# Altium PCB RogoIR.PcbDoc
Units mm, origin at the board's own origin, x right, y up, seen from the top; angles counter-clockwise.
Board outline 62.5 x 62.5 mm, 2 copper layers (Top Layer, Bottom Layer); 73 components, 60 nets, 295 pads, 114 vias.
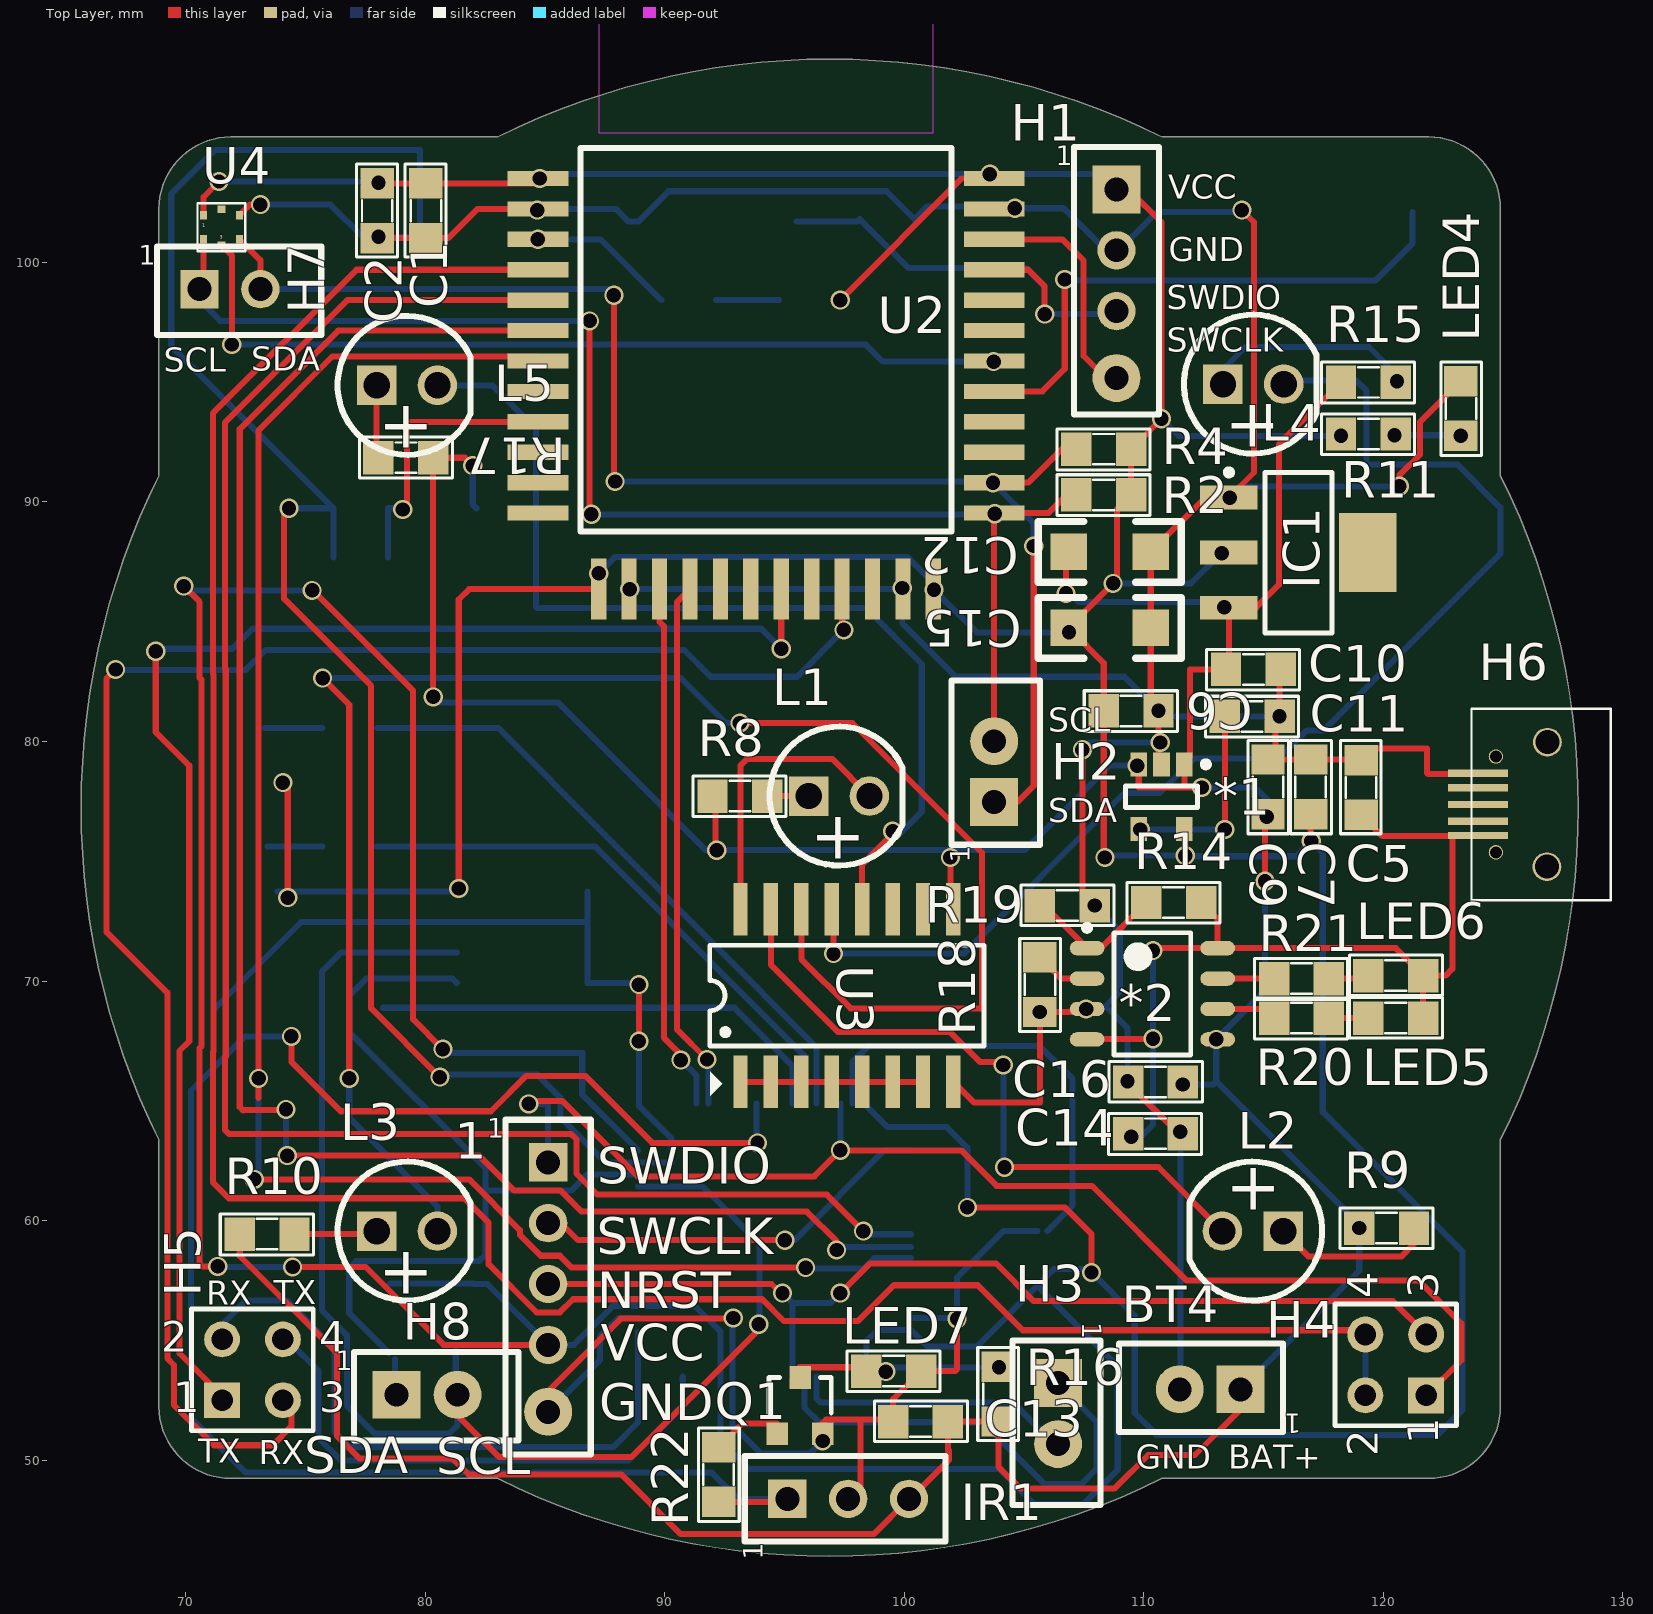
[diagram p0: Top Layer view]
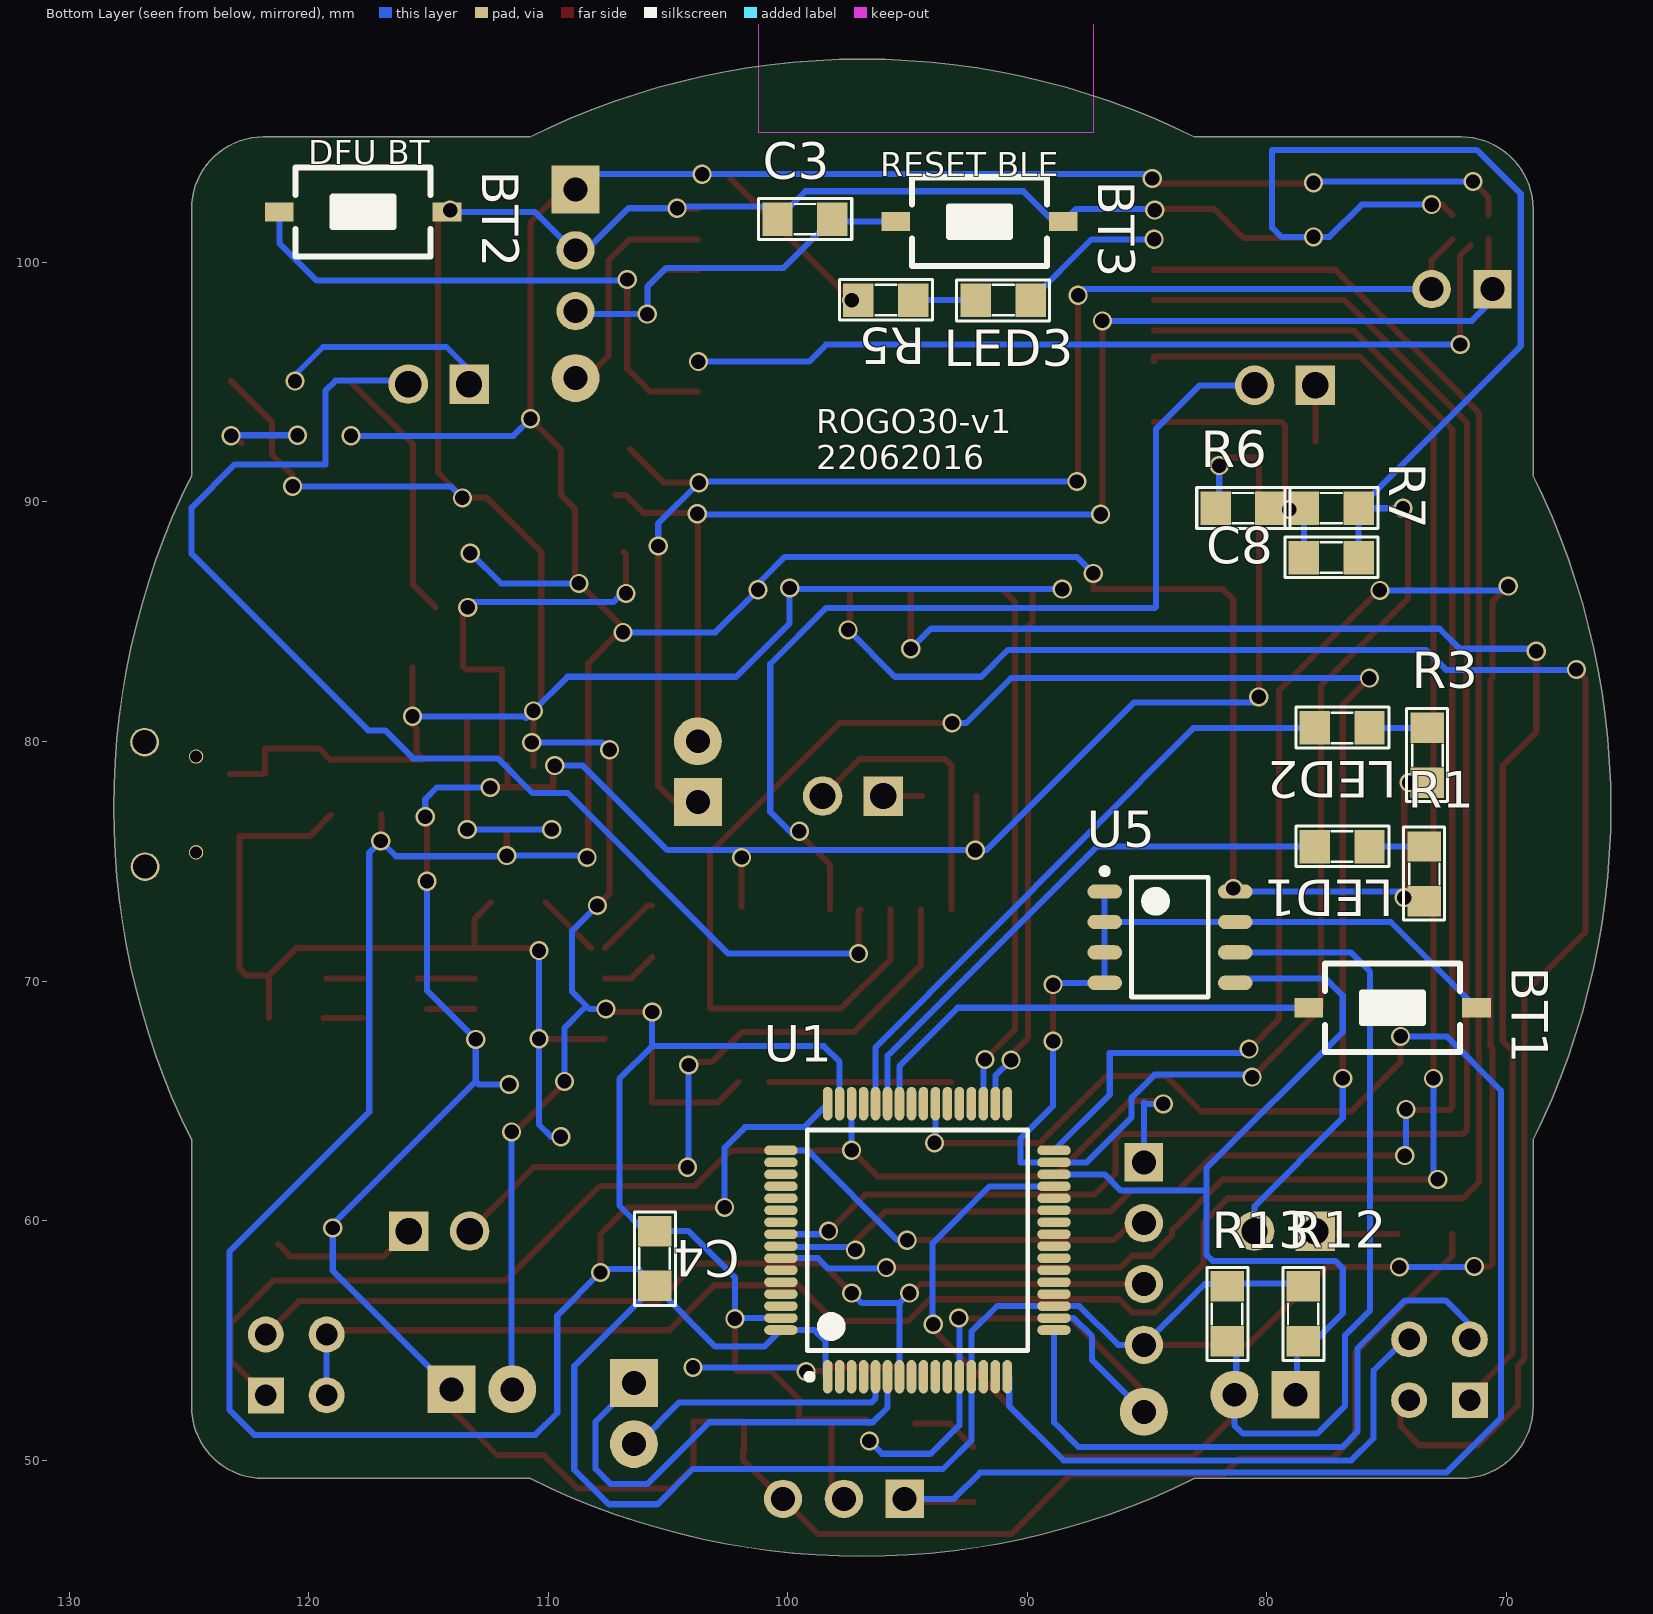
[diagram p1: Bottom Layer view, seen from below]
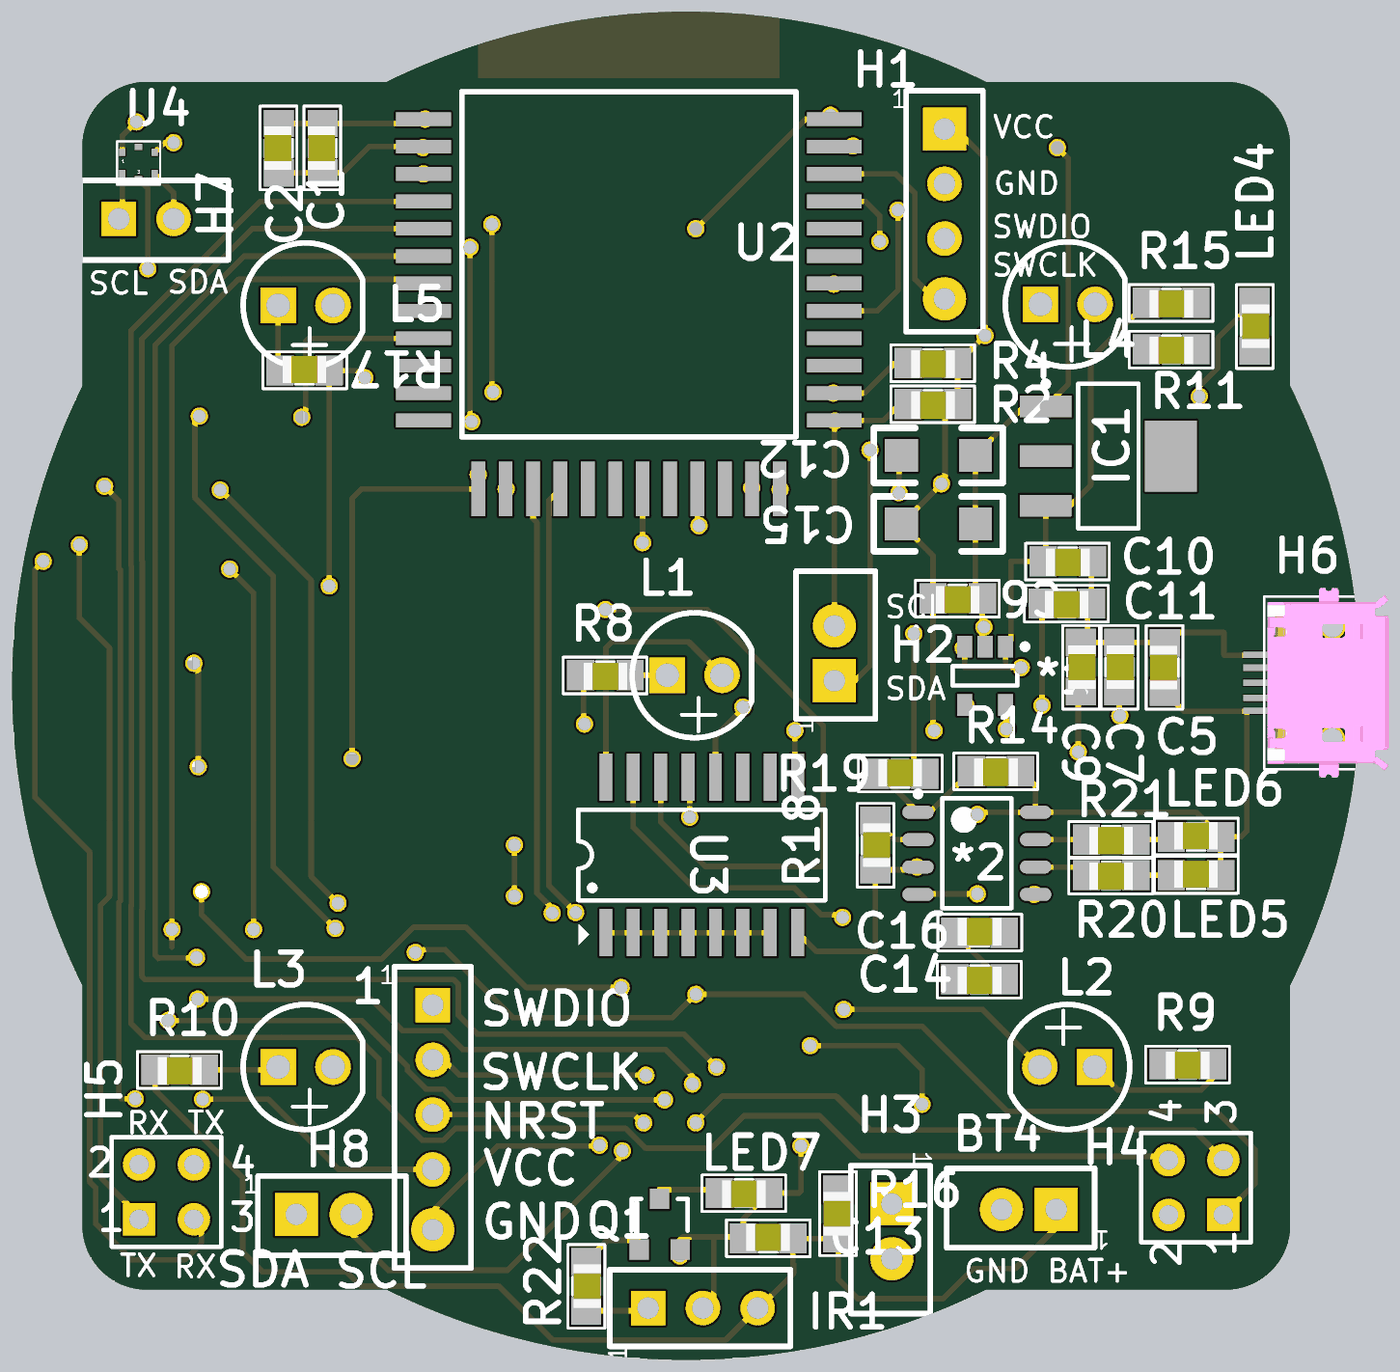
[diagram p2: 3D render of the assembled board from above, using the file's embedded part models]
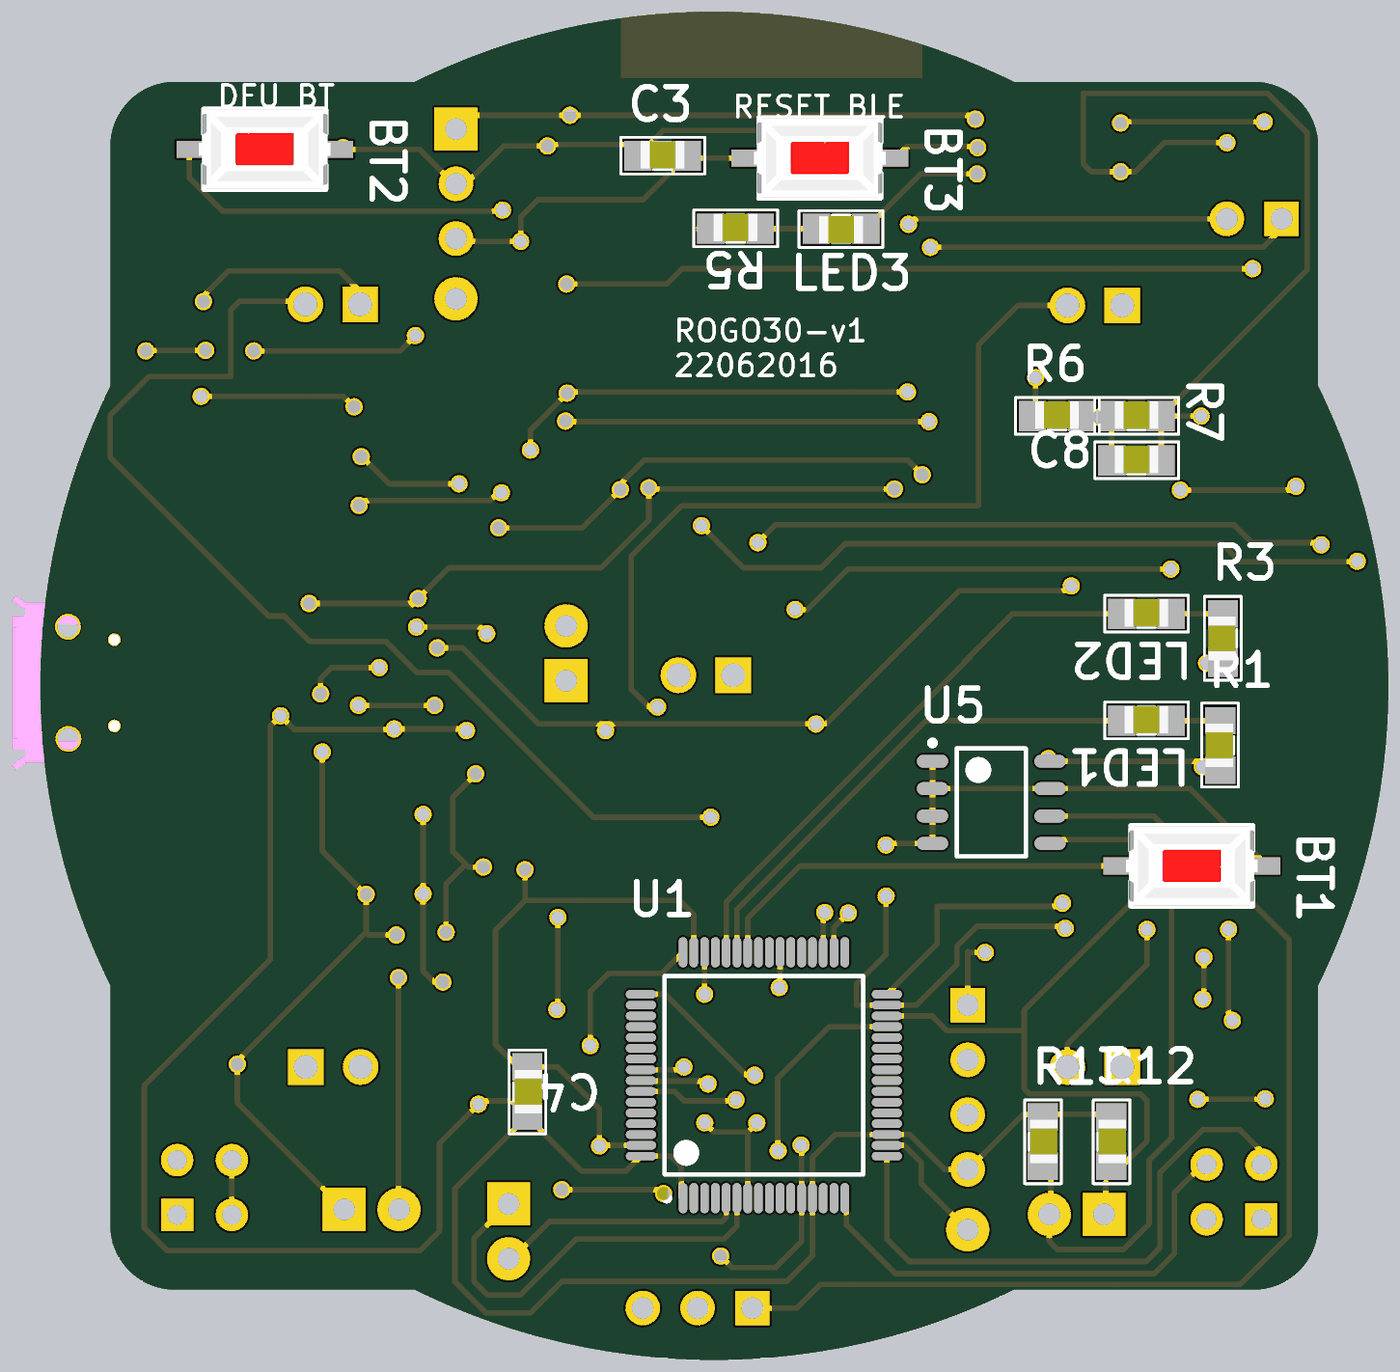
[diagram p3: 3D render of the assembled board from below, using the file's embedded part models]

## Layer stack, top to bottom
Top Solder: solder mask 0.0102, Solder Resist, Dk 3.5
Top Layer: signal copper 0.0356
Dielectric 1: dielectric 0.32, FR-4, Dk 4.8
Bottom Layer: signal copper 0.0356
Bottom Solder: solder mask 0.0102, Solder Resist, Dk 3.5

## Board outline
68.892,52.237 ccw(c71.892,52.237) 71.892,49.237 83.016,49.237 ccw(c96.892,77.237) 110.769,49.237 121.892,49.237 ccw(c121.892,52.237) 124.892,52.237 124.892,63.36 ccw(c96.892,77.237) 124.892,91.114 124.892,102.237 ccw(c121.892,102.237) 121.892,105.237 110.769,105.237 ccw(c96.892,77.237) 83.016,105.237 71.892,105.237 ccw(c71.892,102.237) 68.892,102.237 68.892,91.114 ccw(c96.892,77.237) 68.892,63.36

## Design rules (kind name [scope] priority, off if disabled: settings)
Clearance [All] p1: gap=0.254
PolygonConnect [All] p1: connectstyle=Relief reliefconductorwidth=0.254 reliefentries=4 polygonreliefangle="90 Angle" airgapwidth=0.254
RoutingVias [All] p1: holewidth=0.6 width=0.8 viastyle="Through Hole" minholewidth=0.6 minwidth=0.8 maxholewidth=0.6 maxwidth=0.8
SolderMaskExpansion [All] p1: expansion=0.102
Width [All] p1: maxlimit=0.305 minlimit=0.152 preferedwidth=0.254
30 further rules are at their usual default settings.

## Components (designator, comment, footprint, x,y, rotation, side; value= is the part's Value field where it differs from the comment)
1 "H05S" H05SA 85.141,62.433 r0 top
*1 "LDR3985-3.3" LDR3985-3.3 110.744,77.699 r270 top
*2 "TP4056" TP4056 110.363,69.469 r0 top
BT1 "ST_BT_DEBUG" SW2-SMD 74.752,68.885 r180 bottom
BT2 "DFU_BLE" SW2-SMD 117.729,102.108 r180 bottom
BT3 "RESET_BLE" SW2-SMD 91.999,101.702 r180 bottom
BT4 "PIN 3V" H02MA 114.046,52.959 r180 top
C1 "104" 0805 80.035,102.159 r270 top
C2 "104" 0805 78.003,102.159 r270 top
C3 "104" 0805 99.289,101.803 r0 bottom
C4 "104" 0805 105.562,58.42 r90 bottom
C5 "10uF" 0805 119.075,78.08 r270 top
C6 "10uF" 0805 109.474,81.28 r0 top
C7 "10uF" 0805 116.967,78.105 r90 top
C8 "22p" 0805 77.318,87.681 r0 bottom
C9 "10uF" 0805 115.189,78.105 r90 top
C10 "10uF" 0805 114.579,83.007 r0 top
C11 "10uF" 0805 114.529,81.051 r0 top
C12 "106" 1206 108.712,88.265 r0 top
C13 "22p" 0805 100.686,51.613 r180 top
C14 "10uF" 0805 110.49,63.627 r0 top
C15 "106" 1206 108.712,85.09 r0 top
C16 "10uF" 0805 110.49,65.786 r180 top
H1 "NAP SWD" H04SA 108.864,103.048 r0 top
H2 "H02S" H02SA#1 103.759,77.47 r90 top
H3 "H02S" H02SA#1 106.426,53.213 r270 top
H4 "H04M" HDR2X2 121.793,52.705 r90 top
H5 "H04M" HDR2X2 71.526,52.502 r0 top
H6 "USB" Micro_USB 124.333,76.073 r90 top (schematic designator H?)
H7 "H02S" H02SA#2 70.587,98.882 r0 top
H8 "H02S" H02SA#1 78.816,52.73 r0 top
IC1 "LM1117" lm1117-3.3 116.459,87.884 r0 top
IR1 "IR" H03SA 95.123,48.387 r90 top
L1 "LED_Z5" LED_Z5 97.282,77.724 r0 top
L2 "LED_Z5" LED_Z5 114.554,59.563 r180 top
L3 "LED_Z5" LED_Z5 79.248,59.563 r0 top
L4 "LED_Z5" LED_Z5 114.579,94.92 r0 top
L5 "LED_Z5" LED_Z5 79.248,94.869 r0 top
LED1 "LED" 0805 76.86,75.616 r0 bottom
LED2 "LED" 0805 76.86,80.569 r0 bottom
LED3 "LED" 0805 91.008,98.425 r180 bottom
LED4 "LED" 0805 123.241,93.904 r90 top
LED5 "LED" 0805 120.523,68.453 r180 top
LED6 "LED" 0805 120.523,70.231 r180 top
LED7 "LED" 0805 99.568,53.721 r0 top
Q1 "TRAN-NPN-SMD" TRAN-NPN-SMD 95.656,52.273 r0 top
R1 "1K" 0805 73.431,74.473 r270 bottom
R2 "RESISTOR" 0805 108.331,90.297 r0 top
R3 "1K" 0805 73.304,79.426 r270 bottom
R4 "RESISTOR" 0805 108.331,92.202 r0 top
R5 "1K" 0805 95.91,98.425 r0 bottom
R6 "1M" 0805 81.001,89.738 r0 bottom
R7 "220K" 0805 77.318,89.738 r0 bottom
R8 "2Ohm2" 0805 93.142,77.724 r0 top
R9 "2Ohm2" 0805 120.142,59.69 r0 top
R10 "2Ohm2" 0805 73.406,59.436 r0 top
R11 "1K" 0805 119.38,92.837 r0 top
R12 "RESISTOR" 0805 78.486,56.109 r90 bottom
R13 "RESISTOR" 0805 81.661,56.109 r90 bottom
R14 "RESISTOR" 0805 111.252,73.279 r0 top
R15 "2Ohm2" 0805 119.38,94.996 r0 top
R16 "1k" 0805 103.937,52.756 r270 top
R17 "2Ohm2" 0805 79.197,91.846 r180 top
R18 "RESISTOR" 0805 105.664,69.85 r90 top
R19 "RESISTOR" 0805 106.807,73.152 r180 top
R20 "RESISTOR" 0805 116.586,68.453 r0 top
R21 "RESISTOR" 0805 116.586,70.104 r0 top
R22 "1k" 0805 92.253,49.403 r90 top
U1 "STM32-64PINS" LQFP64Pins 94.59,59.182 r90 bottom
U2 "Module BLE Update" "Module Ble" 84.709,103.505 r0 top
U3 "ULN2003smd" ULN2003-smd16P 97.612,69.393 r0 top
U4 "HTS221" HTS221 71.501,101.473 r0 top
U5 "24C04" 24C04SOIC 84.049,71.831 r180 bottom

## Footprints (in the part's own frame and the unit in brackets; to place one, negate y for a bottom-side part, rotate by r counter-clockwise, add the part's x,y. Pads: shape width x height; smd on the part's side, far side on the other; paste and mask are expansions set on the pad)
24C04SOIC [mm]
  oval 1.45x0.6 smd: 1(-2.725,1.905) 2(-2.725,0.635) 3(-2.725,-0.635) 4(-2.725,-1.905) 5(2.725,-1.905) 6(2.725,-0.635) 7(2.725,0.635) 8(2.725,1.905)
  silkscreen extent -2.85,-2.5 1.6,2.88, body extent -2,-2.5 2,2.5, height 1.35
0805 [mil] "Compoment SMD 80x50mil"
  rect 50x55 smd: 1(-45,0) 2(45,0)
  silkscreen extent -77,-34 76,33, body extent -40,-27 40,23, height 24
1206 [mil]
  rect 60x60 smd: 1(-72.68,-13.74) 2(62.32,-13.74)
  silkscreen extent -123,-64 112,36
H02MA [mm] "HEADER, SINGLE, DISTANCE = 100mil"
  rect 2x2 hole 1: 1(0,0)
  round 2 hole 1: 2(2.54,0)
  silkscreen extent -1.78,-1.91 5.08,1.78
H02SA#1 [mm] "HEADER, SINGLE, DISTANCE = 100mil"
  rect 2x2 hole 1: 1(0,0)
  round 2 hole 1: 2(2.54,0)
  silkscreen extent -1.78,-1.91 5.08,1.78
H02SA#2 [mm] "HEADER, SINGLE, DISTANCE = 100mil"
  rect 1.6x1.6 hole 1: 1(0,0)
  round 1.6 hole 1: 2(2.54,0)
  silkscreen extent -1.78,-1.91 5.08,1.78
H03SA [mm] "HEADER, SINGLE, DISTANCE = 100mil"
  rect 1.6x1.6 hole 1: 1(0,0)
  round 1.6 hole 1: 2(0,-2.54) 3(0,-5.08)
  silkscreen extent -1.78,-6.6 1.78,1.78
H04SA [mm] "HEADER, SINGLE, DISTANCE = 100mil"
  rect 2x2 hole 1: 1(0,0)
  round 1.6 hole 1: 2(0,-2.54) 3(0,-5.08)
  round 2 hole 1: 4(0,-7.874)
  silkscreen extent -1.78,-9.4 1.78,1.78
H05SA [mm] "HEADER, SINGLE, DISTANCE = 100mil"
  rect 1.6x1.6 hole 1: 1(0,0)
  round 1.6 hole 1: 2(0,-2.54) 3(0,-5.08) 4(0,-7.62)
  round 2 hole 1: 5(0,-10.414)
  silkscreen extent -1.78,-12.19 1.78,1.78
HDR2X2 [mm] "Connector; Header; 2x2 Position"
  rect 1.5x1.5 hole 0.9: 1(0,0)
  round 1.5 hole 0.9: 2(0,2.54) 3(2.54,0) 4(2.54,2.54)
  silkscreen extent -1.27,-1.27 3.81,3.81
HTS221 [mm]
  rect 0.3x0.35 smd mask+0.05: 1(-0.75,0.5) 2(-0.75,-0.5) 4(0.75,-0.5) 5(0.75,0.5)
  rect 0.35x0.3 smd mask+0.05: 3(0,-0.75) 6(0,0.75)
  silkscreen extent -1,-1 1,1
LDR3985-3.3 [mm] "SOT23, 5-Leads, Body 2.90x2.80mm, Pitch 0.95mm, IPC Medium Density"
  rect 1x0.7 smd: 1(-1.35,0.95) 2(-1.35,0) 3(-1.35,-0.95) 4(1.35,-0.95) 5(1.35,0.95)
  silkscreen extent -1.47,-1.5 0.45,1.98, body extent -0.85,-1.5 0.85,1.5, height 0.9
LED_Z5 [mil] "LED phi 5mm"
  rect 65x65 hole 43.31: 1(-50,0)
  round 65 hole 43.31: 2(50,0)
  silkscreen extent -114,-114 104,114
lm1117-3.3 [mm] "SOT223, 4-Leads, Body 6.5x3.5mm, Pitch 2.3mm, Lead Span 7mm, IPC Medium Density"
  rect 2.4x1 smd: 1(-2.9,2.3) 2(-2.9,0) 3(-2.9,-2.3)
  rect 2.4x3.3 smd: 4(2.9,0)
  silkscreen extent -3.02,-3.35 1.4,3.47, body extent -1.85,-3.35 1.85,3.35, height 1.8
LQFP64Pins [mm]
  oval 1.4x0.4 smd: 1(-5.7,3.75) 2(-5.7,3.25) 3(-5.7,2.75) 4(-5.7,2.25) 5(-5.7,1.75) 6(-5.7,1.25) 7(-5.7,0.75) 8(-5.7,0.25) 9(-5.7,-0.25) 10(-5.7,-0.75) 11(-5.7,-1.25) 12(-5.7,-1.75) 13(-5.7,-2.25) 14(-5.7,-2.75) 15(-5.7,-3.25) 16(-5.7,-3.75) 33(5.7,-3.75) 34(5.7,-3.25) 35(5.7,-2.75) 36(5.7,-2.25) 37(5.7,-1.75) 38(5.7,-1.25) 39(5.7,-0.75) 40(5.7,-0.25) 41(5.7,0.25) 42(5.7,0.75) 43(5.7,1.25) 44(5.7,1.75) 45(5.7,2.25) 46(5.7,2.75) 47(5.7,3.25) 48(5.7,3.75)
  oval 0.4x1.4 smd: 17(-3.75,-5.7) 18(-3.25,-5.7) 19(-2.75,-5.7) 20(-2.25,-5.7) 21(-1.75,-5.7) 22(-1.25,-5.7) 23(-0.75,-5.7) 24(-0.25,-5.7) 25(0.25,-5.7) 26(0.75,-5.7) 27(1.25,-5.7) 28(1.75,-5.7) 29(2.25,-5.7) 30(2.75,-5.7) 31(3.25,-5.7) 32(3.75,-5.7) 49(3.75,5.7) 50(3.25,5.7) 51(2.75,5.7) 52(2.25,5.7) 53(1.75,5.7) 54(1.25,5.7) 55(0.75,5.7) 56(0.25,5.7) 57(-0.25,5.7) 58(-0.75,5.7) 59(-1.25,5.7) 60(-1.75,5.7) 61(-2.25,5.7) 62(-2.75,5.7) 63(-3.25,5.7) 64(-3.75,5.7)
  silkscreen extent -5.82,-4.6 4.6,4.62, body extent -5,-5 5,5, height 1.6
Micro_USB [mm]
  rect 0.3x2.5 smd mask+0.05: 1(0,0.37) 2(0.6,0.37) 3(1.3,0.37) 4(2,0.37) 5(2.6,0.37)
  round 1.2 hole 1 mask+0.05: ""(-1.3,-2.5) ""(3.9,-2.52)
  round 0.6 hole 0.5 mask+0.05: ""(-0.7,-0.37) ""(3.3,-0.37)
  silkscreen extent -2.7,-5.17 5.3,0.65, body extent -3.1,-5.12 5.7,0.51, height 2.77
"Module Ble" [mm]
  rect 2.54x0.635 smd: 1(0,0) 2(0,-1.27) 3(0,-2.54) 4(0,-3.81) 5(0,-5.08) 6(0,-6.35) 7(0,-7.62) 8(0,-8.89) 9(0,-10.16) 10(0,-11.43) 11(0,-12.7) 12(0,-13.97) 25(19.05,-13.97) 26(19.05,-12.7) 27(19.05,-11.43) 28(19.05,-10.16) 29(19.05,-8.89) 30(19.05,-7.62) 31(19.05,-6.35) 32(19.05,-5.08) 33(19.05,-3.81) 34(19.05,-2.54) 35(19.05,-1.27) 36(19.05,0)
  rect 0.635x2.54 smd: 13(2.54,-17.145) 14(3.81,-17.145) 15(5.08,-17.145) 16(6.35,-17.145) 17(7.62,-17.145) 18(8.89,-17.145) 19(10.16,-17.145) 20(11.43,-17.145) 21(12.7,-17.145) 22(13.97,-17.145) 23(15.24,-17.145) 24(16.51,-17.145)
  Keep-Out Layer region: 2.54,9.525 2.54,1.905 16.51,1.905 16.51,9.525
  silkscreen extent 1.78,-14.73 17.27,1.27
SW2-SMD [mm] "Switch SMD type"
  rect 1.2x0.8 smd: 1(-3.5,0) 2(3.5,0)
  silkscreen extent -2.82,-1.85 2.82,1.85, body extent -3.05,-1.85 3.05,1.85, height 2.5
TP4056 [mm] "SOP, 8-Leads, Body 4.90x3.90mm, Pitch 1.27mm, IPC Medium Density"
  oval 1.45x0.6 smd: 1(-2.725,1.905) 2(-2.725,0.635) 3(-2.725,-0.635) 4(-2.725,-1.905) 5(2.725,-1.905) 6(2.725,-0.635) 7(2.725,0.635) 8(2.725,1.905)
  silkscreen extent -2.85,-2.55 1.6,2.88, body extent -2,-2.55 2,2.55, height 1.75
TRAN-NPN-SMD [mm] "SOT-23; 3 Leads; Body 3.0 x 2.5 mm, inc. leads (LxW max)"
  rect 0.9x0.95 smd: 1(-0.95,-1.175) 2(0.95,-1.175) 3(0,1.175)
  silkscreen extent -1.3,-0.3 1.3,1.18
ULN2003-smd16P [mm] "Small Outline; 16 Leads; Body Width 5.6 mm; Pitch 1.27 mm"
  rect 0.6x2.2 smd: 1(-4.445,-3.6) 2(-3.175,-3.6) 3(-1.905,-3.6) 4(-0.635,-3.6) 5(0.635,-3.6) 6(1.905,-3.6) 7(3.175,-3.6) 8(4.445,-3.6) 9(4.445,3.6) 10(3.175,3.6) 11(1.905,3.6) 12(0.635,3.6) 13(-0.635,3.6) 14(-1.905,3.6) 15(-3.175,3.6) 16(-4.445,3.6)
  silkscreen extent -5.73,-4.19 5.73,2.1

## Part data
1 H2 H3 H7 H8: "HEADER, SINGLE"
BT1 BT2 BT3: library part "BUTTON 2 PIN"
BT4: "Battery 3VDC"
C1 C2 C3 C4 C5 C6 C7 C8 C9 C10 C11 C13 C14 C16: library part Cap
C12 C15: library part CAPACITOR, "Capacitor"
H4 H5: "HEADER, DOUBLE"
H6: "USB conector"
IC1: "Available in 1.8V, 2.5V, 2.85V, 3.3V, 5V, and  Adjustable Versions"
IR1: "Receiver Infraed IC"
L1 L2 L3 L4 L5 LED1 LED2 LED3 LED4 LED5 LED6 LED7: "LED Single colour Green and Red"
Q1: "NPN 600mW, ECB"
R1 R3 R5 R6 R7 R8 R9 R10 R11 R15 R16 R17 R22: library part Res, "Resistor 1/4W"
R2 R4 R12 R13 R14 R18 R19 R20 R21: "Resistor 1/4W"

## Via types
v1: diameter 0.8, hole 0.6, Top Layer to Bottom Layer, 114 vias

## Nets (pads, with @x,y where several pads share a name; then routed paths per layer and width w, separated by ;. In a path a pad name is that pad's centre, name@x,y a point inside that pad or via, vN(x,y) a via of type N, cw(c..) or ccw(c..) an arc to the next point about the centre after c; other vN are vias at no path point)
5VCC_USB: *2.4 *2.8 C5.2 C14.1 H6.1 LED5.1 LED6.1 R14.2 | length 38.1
  Top Layer w0.254: *2.4@107.663,67.589 v1(110.388,67.589) ; v1(110.388,71.272) 110.287,71.374 *2.8 ; R14.2 113.088,72.586 *2.8 ; C5.2 119.964,76.048 122.885,76.048 122.885,70.51 122.606,70.231 LED6.1 ; LED5.1 LED6.1 ; *2.8 120.523,71.374 LED6.1
  Bottom Layer w0.254: v1(109.474,63.5) 109.88,63.5 110.388,64.008 v1(110.388,67.589) v1(110.388,71.272)
ADC_BAT: C8.2 R6.1 R7.2 U2.9 | length 11.9
  Top Layer w0.254: v1(79.07,89.687) 79.248,89.865 79.248,93.193 79.4,93.345 U2.9
  Bottom Layer w0.254: C8.2 R7.2 79.121,89.738 v1(79.07,89.687)
BLE_DFU: BT2.1 U2.29 | length 23.7
  Top Layer w0.254: U2.29 105.766,94.615 106.705,95.555 v1(106.705,99.289)
  Bottom Layer w0.254: v1(106.705,99.289) 106.655,99.238 119.659,99.238 121.229,100.807 BT2.1
BLE_LED: LED3.2 U2.3 | length 6.2
  Bottom Layer w0.254: v1(84.709,100.965) 87.325,100.965 LED3.2
BLE_RESET_ST: H4.2 H4.4 U2.4 | length 104.2
  Top Layer w0.254: U2.4 77.14,99.695 71.145,93.701 71.145,82.818 71.171,82.793 71.171,67.067 71.145,67.042 71.145,61.595 71.806,60.935 81.636,60.935 82.652,59.919 82.652,58.172 84.652,56.172 85.63,56.172 86.176,56.718 94.069,56.718 94.984,55.804 98.069,55.804 99.568,57.302 103.073,57.302 104.953,55.423 119.075,55.423 H4.4
  Bottom Layer w0.254: H4.2 H4.4
BLE_RX: H5.3 U2.21 | length 72.6
  Top Layer w0.254: v1(67.081,83.007) 66.7,82.626 66.7,72.06 69.24,69.52 69.24,54.247 69.52,53.968 69.52,52.299 71.196,50.622 73.635,50.622 74.422,51.41 H5.3@74.422,52.324 ; U2.21 97.409,84.734 v1(97.485,84.658)
  Bottom Layer w0.254: v1(67.081,83.007) 67.1,82.988 72.523,82.988 73.355,83.82 90.812,83.82 91.93,82.702 95.529,82.702 v1(97.485,84.658)
BLE_SCL: H2.2 H7.1 R2.1 U2.25 U4.2 | length 57.2
  Top Layer w0.254: H7.1@70.751,99.047 U4.2 ; v1(86.868,97.561) 86.868,89.56 v1(86.944,89.484) ; H2.2 U2.25@103.759,89.51 ; U2.25@103.784,89.535 106.02,89.535 106.782,90.297 R2.1
  Bottom Layer w0.254: H7.1 70.587,98.425 71.45,97.561 v1(86.868,97.561) ; v1(86.944,89.484) 103.784,89.484 v1(103.784,89.51)
BLE_SDA: H2.1 H7.2 R4.1 U2.26 U4.4 | length 59.6
  Top Layer w0.254: U4.4 73.127,100.097 H7.2 ; v1(87.884,98.628) 87.884,90.907 v1(87.935,90.856) ; H2.1 104.724,77.47 105.41,78.156 v1(105.41,88.163) ; U2.26 105.181,90.805 R4.1@106.578,92.202
  Bottom Layer w0.254: H7.2 87.63,98.882 v1(87.884,98.628) ; v1(87.935,90.856) 103.657,90.856 v1(103.708,90.805) 105.41,89.103 v1(105.41,88.163)
BLE_STATUS_ST: U1.34 U2.15 | length 22.2
  Top Layer w0.254: U2.15 89.789,84.988 89.967,84.811 89.967,67.64 90.805,66.802 90.78,66.802 v1(90.678,66.7)
  Bottom Layer w0.254: v1(90.678,66.7) 91.34,66.039 U1.34
BLE_STATUS_ST1: U1.56 U2.5 | length 75.8
  Top Layer w0.254: U2.5 76.759,98.425 71.653,93.32 71.653,83.029 71.679,83.003 71.679,66.857 71.653,66.831 71.653,63.779 71.819,63.614 86.099,63.614 86.322,63.391 86.322,61.963 87.198,61.087 96.774,61.087 v1(98.298,59.563)
  Bottom Layer w0.254: v1@98.429,59.432 U1.56
BLE_STATUS_ST2: U1.57 U2.6 | length 74.1
  Top Layer w0.254: v1(74.193,64.643) 74.168,64.618 72.441,64.618 72.415,64.592 72.263,64.745 72.263,93.04 76.378,97.155 U2.6 ; v1(74.244,62.713) 82.271,62.713 83.731,61.252 85.661,61.252 86.538,60.376 95.936,60.376 97.18,59.131 v1(97.18,58.776)
  Bottom Layer w0.254: v1(74.193,64.643) 74.193,62.763 v1(74.244,62.713) ; v1@97.337,58.907 U1.57@100.29,58.907
BLE_STATUS_ST3: U1.58 U2.7 | length 74.7
  Top Layer w0.254: v1@72.771,65.938 73.05,66.218 73.05,92.989 76.136,96.075 84.709,96.075 U2.7 ; v1(72.873,61.722) 81.839,61.722 83.96,59.601 83.96,59.404 84.83,58.534 85.63,58.534 86.125,58.039 v1(95.885,58.039) ; 73.05,65.126 v1(73.05,65.938)
  Bottom Layer w0.254: v1(72.873,61.722) 73.05,61.9 v1(73.05,65.938) ; v1(95.885,58.039) 95.929,57.995 98.304,57.995 98.742,58.432 U1.58
BLE_TX: H5.1 U2.19 | length 62.7
  Top Layer w0.254: v1(68.758,83.769) 68.758,80.391 70.155,78.994 70.155,67.488 69.748,67.081 69.748,54.458 H5.1@71.882,52.324 ; v1(94.869,83.871) U2.19
  Bottom Layer w0.254: v1(68.758,83.769) 68.707,83.769 68.605,83.871 71.958,83.871 72.796,84.709 94.031,84.709 v1(94.869,83.871)
BLE_WAKEUP_ST: U1.35 U2.16 | length 22.1
  Top Layer w0.254: U2.16 90.526,85.827 90.526,67.97 v1(91.77,66.726)
  Bottom Layer w0.254: U1.35 v1@91.84,66.656
GND_PIN: 1.5 *1.2 *2.3 BT1.2 BT2.2 BT3.2 BT4.2 C1.2 C2.2 C3.2 C4.2 C5.1 C6.2 C7.2 C8.1 C9.2 C10.2 C11.2 C12.2 C13.2 C14.2 C15.2 C16.2 H1.2 H6.5 IC1.1 IR1.2 LED4.2 LED7.2 Q1.2 R7.1 R18.1 R19.1 U1.12 U1.18 U1.31 U1.47 U1.63 U2.2 U2.14 U2.23 U2.35 U3.8 U4.5 U5.1 U5.2 U5.3 U5.4 U5.7 | length 342
  Top Layer w0.254: U4.5 72.691,102.413 v1(73.127,102.413) ; v1(74.32,89.738) 74.117,89.535 74.117,85.954 77.749,82.321 77.749,68.859 v1(80.62,65.989) ; C2.2@78.054,101.016 C1.2 80.975,101.016 82.194,102.235 U2.2 ; v1(84.684,102.184) U2.2@84.684,102.21 ; 1.5@85.141,52.883 88.163,55.905 92.837,55.905 v1(92.869,55.937) ; U2.14 v1(88.544,86.36) ; v1(88.925,67.488) v1(88.925,69.85) ; Q1.2@96.581,51.53 96.74,51.689 98.171,51.689 ; v1(96.596,50.8) Q1.2@96.596,51.088 ; IR1.2 98.171,48.895 98.171,51.689 ; U3.8 102.928,64.922 105.664,64.922 v1(105.664,68.707) *2.3@107.511,68.707 ; v1(102.21,55.905) 102.21,53.797 102.133,53.721 LED7.2 99.543,52.553 C13.2 99.466,51.689 98.171,51.689 ; U2.35 104.597,102.235 v1(104.623,102.26) ; v1(107.442,79.654) 107.442,73.66 v1(107.95,73.152) ; C16.2@109.322,65.761 111.455,63.627 v1(111.531,63.703) ; C6.2@110.295,81.602 C15.2 C12.2 112.563,90.184 IC1.1 114.605,91.23 114.605,101.676 v1(114.097,102.184) ; *1.2@110.617,78.972 v1@110.617,79.883 ; v1(110.617,81.28) v1@110.617,79.883 ; v1(110.693,79.959) v1@110.617,79.883 ; C10.2@115.672,83.083 v1(115.672,81.051) 115.672,80.721 115.494,80.543 115.494,79.553 C9.2 C7.2 119.05,79.248 C5.1 119.558,79.705 121.818,79.705 121.818,78.689 121.86,78.648 H6.5@123.277,78.648 ; v1(120.675,90.653) 120.675,91.117 121.539,91.981 121.539,93.345 LED4.2
  Bottom Layer w0.254: BT1.2 74.834,72.466 U5.7 U5.2 ; v1(73.127,102.413) 76.048,102.413 77.394,101.067 v1(78.054,101.067) 79.4,101.067 79.781,101.448 79.781,104.699 71.247,104.699 69.406,102.857 69.406,96.507 R7.1 ; v1(74.32,89.738) R7.1 ; C8.1 R7.1 ; v1(80.62,65.989) 80.518,66.091 84.691,66.091 85.649,65.133 85.649,64.313 87.53,62.432 U1.31 90.296,62.432 90.296,63.425 88.925,64.795 v1(88.925,67.488) ; v1(84.684,102.184) 84.734,102.235 87.965,102.235 BT3.2 88.9,101.702 90.17,102.972 99.263,102.972 C3.2 100.965,102.337 v1@104.546,102.337 ; 1.5 87.3,54.178 87.3,55.164 88.068,55.932 U1.18 ; U5.1 U5.2 ; v1(88.544,86.36) 99.873,86.36 v1(99.924,86.411) 99.924,84.938 102.159,82.702 109.195,82.702 v1(110.617,81.28) 110.922,80.975 110.998,81.051 v1(115.672,81.051) ; v1(88.925,69.85) 88.849,69.926 U5.4 U5.3 U5.2 ; v1(92.869,55.937) 92.84,55.908 U1.12 92.84,51.458 94.031,50.267 96.063,50.267 v1(96.596,50.8) ; U1.47 97.84,66.623 98.501,67.285 105.664,67.285 ; U1.63 102.183,55.932 v1(102.21,55.905) 102.21,57.633 104.14,59.563 C4.2 ; v1(104.623,102.26) 106.655,102.26 108.458,100.457 108.915,100.457 110.566,102.108 114.173,102.108 v1(114.097,102.184) ; v1(105.664,68.707) 105.664,67.285 ; C4.2@105.969,59.563 107.036,60.63 107.036,65.913 105.664,67.285 ; v1(107.442,79.654) 107.747,79.959 v1(110.693,79.959) ; v1(107.594,68.834) 108.28,68.834 109.017,69.571 109.017,72.085 v1(107.95,73.152) ; 108.534,68.834 109.322,68.047 v1(109.322,65.811) ; BT4.2@111.531,52.984 v1(111.531,63.703) ; v1(113.589,90.17) 114.071,90.653 v1(120.675,90.653)
IR_SEND: U3.1 U3.2 U3.3 U3.4 U3.5 U3.6 U3.7 | length 7.6
  Top Layer w0.254: U3.1 U3.2 U3.3 U3.4 U3.5 U3.6 U3.7
IR_SEND1: L1.2 U3.16 | length 12.1
  Top Layer w0.254: U3.16 93.167,78.994 93.447,79.273 97.003,79.273 L1.2
IR_SEND2: L2.2 U3.15 | length 28.2
  Top Layer w0.254: U3.15 94.437,70.688 97.257,67.869 101.92,67.869 103.165,66.624 104.013,66.624 v1(104.14,66.497) ; v1(104.191,62.23) 110.617,62.23 L2.2
  Bottom Layer w0.254: v1(104.14,66.497) 104.14,62.281 v1(104.191,62.23)
IR_SEND3: L3.2 U3.14 | length 72.6
  Top Layer w0.254: v1(75.724,82.645) 76.835,81.534 v1(76.835,65.938) ; v1(93.142,80.772) 97.841,80.772 103.251,75.362 103.251,68.859 97.765,68.859 95.707,70.917 U3.14
  Bottom Layer w0.254: v1(75.724,82.645) 90.684,82.645 92.558,80.772 v1(93.142,80.772) ; v1(76.835,65.938) 76.835,64.287 80.518,60.604 L3.2
IR_SEND4: L4.2 U3.13 | length 51.7
  Top Layer w0.254: U3.13 97.053,72.917 v1(97.053,71.145)
  Bottom Layer w0.254: v1(97.053,71.145) 102.489,71.145 109.195,77.851 110.668,77.851 112.116,79.299 115.646,79.299 116.815,80.467 117.526,80.467 124.892,87.833 124.892,89.764 123.088,91.567 119.304,91.567 119.304,94.64 118.88,95.064 115.994,95.064 L4.2
IR_SEND5: L5.2 U3.12 | length 41.1
  Top Layer w0.254: U3.12 98.247,74.879 99.619,76.251 v1(99.517,76.251)
  Bottom Layer w0.254: L5.2 82.804,94.869 84.633,93.04 84.633,85.623 84.677,85.579 98.393,85.579 100.736,83.236 100.736,77.064 99.822,76.149 99.619,76.149 v1(99.517,76.251)
IR_SEND6: U3.11
IR_SEND7: U3.10
Net*1_4: *1.4 C11.1 | length 8.3
  Top Layer w0.254: v1(113.386,76.327) C11.1
  Bottom Layer w0.254: v1(109.855,76.327) v1(113.386,76.327)
Net*2_1: *2.1 R14.1 R19.2 | length 5.4
  Top Layer w0.254: R19.2 105.86,73.152 *2.1 ; *2.1@108.204,71.374 R14.1
Net*2_2: *2.2 R18.2 | length 2.3
  Top Layer w0.254: R18.2 106.553,70.104 *2.2
Net*2_6: *2.6 R20.1 | length 2
  Top Layer w0.254: *2.6 R20.1@115.062,68.834
Net*2_7: *2.7 R21.1 | length 2.4
  Top Layer w0.254: *2.7 R21.1
NetH3_1: H3.1 U1.6 | length 19.3
  Bottom Layer w0.254: U1.6 95.84,52.192 96.45,51.581 103.283,51.581 105.867,48.997 107.391,48.997 108.026,49.632 108.026,51.613 H3.1
NetH3_2: H3.2 U1.5 | length 11.8
  Bottom Layer w0.254: U1.5 96.34,52.581 96.519,52.401 104.547,52.401 106.275,50.673 H3.2
NetL1_1: L1.1 R8.2 | length 1.6
  Top Layer w0.254: R8.2@94.412,77.724 L1.1
NetL2_1: L2.1 R9.2 | length 6.1
  Top Layer w0.254: L2.1 116.891,58.496 120.752,58.496 R9.2@121.285,59.03
NetL3_1: L3.1 R10.2 | length 3.3
  Top Layer w0.254: R10.2 L3.1@77.851,59.436
NetL4_1: L4.1 R15.2 | length 9.2
  Top Layer w0.254: R15.2 v1(120.574,95.047)
  Bottom Layer w0.254: L4.1@112.776,94.996 114.249,96.469 119.405,96.469 120.574,95.301 v1(120.574,95.047)
NetL5_1: L5.1 R17.2 | length 2.3
  Top Layer w0.254: R17.2@77.978,92.532 L5.1
NetLED1_1: LED1.1 R1.1 | length 2.3
  Bottom Layer w0.254: R1.1 LED1.1
NetLED2_1: LED2.1 R3.1 | length 2.4
  Bottom Layer w0.254: R3.1 LED2.1
NetLED3_1: LED3.1 R5.1 | length 2.6
  Bottom Layer w0.254: LED3.1 R5.1
NetLED4_1: LED4.1 R11.2 | length 3.4
  Top Layer w0.254: v1(120.472,92.786) R11.2 ; LED4.1@122.809,92.456 123.114,92.761 v1(123.241,92.761)
  Bottom Layer w0.254: v1(120.472,92.786) 123.215,92.786 v1(123.241,92.761)
NetLED5_2: LED5.2 R20.2 | length 1.7
  Top Layer w0.254: R20.2 LED5.2
NetLED6_2: LED6.2 R21.2 | length 1.5
  Top Layer w0.254: R21.2 LED6.2@119.253,70.104
NetLED7_1: LED7.1 Q1.3 R16.1 | length 8.5
  Top Layer w0.254: Q1.3@95.631,53.88 98.266,53.88 LED7.1 99.212,53.721 v1(99.238,53.696)
  Bottom Layer w0.254: v1(99.238,53.696) 99.416,53.873 v1(103.962,53.873)
NetQ1_1: Q1.1 R22.2 | length 2.8
  Top Layer w0.254: R22.2 93.237,51.53 Q1.1@94.681,51.53
SIGN_DRY: U2.30 U4.3 | length 36.4
  Top Layer w0.254: U4.3 71.933,100.291 v1(71.933,96.571)
  Bottom Layer w0.254: v1(71.933,96.571) 98.4,96.571 99.111,95.86 v1(103.734,95.86)
ST_BUTTON: BT1.1 U1.42 | length 19.6
  Bottom Layer w0.254: BT1.1 92.913,68.885 95.326,66.472 ; U1.42 95.34,66.458
ST_IR_OUT1: U1.23
ST_IR_THU: IR1.1 R22.1 U1.39 | length 72.8
  Top Layer w0.254: v1(74.422,67.691) 74.422,66.624 76.479,64.567 82.753,64.567 84.226,66.04 86.69,66.04 89.484,63.246 v1(93.878,63.246) ; R22.1 94.996,48.26 IR1.1
  Bottom Layer w0.254: v1(74.422,67.691) 72.492,67.691 70.231,65.43 70.231,51.758 72.51,49.479 91.973,49.479 93.066,48.387 IR1.1 ; U1.39 93.84,63.285 v1(93.878,63.246)
ST_LED1: LED1.2 U1.43 | length 23.4
  Bottom Layer w0.254: LED1.2 87.097,75.616 95.832,66.881 ; U1.43 95.84,66.873
ST_LED2: LED2.2 U1.44 | length 26.2
  Bottom Layer w0.254: LED2.2 83.058,80.569 96.34,67.231 U1.44
ST_NRST: 1.3 H4.3 U1.7 | length 41.9
  Top Layer w0.254: 1.3 94.463,57.353 94.844,56.972 v1(94.92,56.972) ; v1(97.333,56.972) 98.577,58.217 103.835,58.217 105.41,56.642 120.396,56.642 H4.3
  Bottom Layer w0.254: v1(94.92,56.972) 95.301,56.591 ; U1.7 95.34,56.552 96.913,56.552 v1(97.333,56.972)
ST_RX: H5.2 U1.17 | length 27.5
  Bottom Layer w0.254: H5.2@71.882,54.864 71.476,55.27 71.476,55.601 72.542,56.667 74.218,56.667 76.225,54.66 76.225,51.181 76.86,50.546 87.859,50.546 88.89,51.577 U1.17@88.89,55.351
ST_SCL: H8.2 R13.1 U1.29 U5.6 | length 59.2
  Top Layer w0.254: H8.2@81.28,51.943 83.083,50.14 88.621,50.14 93.993,55.512 93.828,55.677 v1(93.929,55.677)
  Bottom Layer w0.254: H8.2@81.28,51.943 R13.1@81.28,54.585 ; U5.6 76.505,71.196 75.692,70.383 75.692,56.261 76.733,55.22 76.733,52.274 77.903,51.105 81.001,51.105 81.356,51.46 H8.2 ; U1.29 91.582,61.432 93.955,59.059 93.955,55.753 93.878,55.677 v1(93.929,55.677)
ST_SDA: H8.1 R12.1 U1.30 U5.5 | length 37.1
  Bottom Layer w0.254: R12.1@78.486,54.483 76.835,56.134 76.835,58.014 77.14,58.318 82.271,58.318 82.525,58.572 82.525,61.252 ; H8.1@78.74,51.943 78.74,54.229 ; U5.5 81.146,70.104 77.546,70.104 76.835,69.393 76.835,67.869 82.525,62.179 82.525,61.252 ; U1.30 86.778,61.932 86.099,61.252 82.525,61.252
ST_SWCLK: 1.2 U1.49 | length 16.6
  Top Layer w0.254: 1.2 85.674,59.893 86.385,59.182 v1(95.021,59.182)
  Bottom Layer w0.254: 95.428,59.182 99.178,62.932 U1.49
ST_SWDIO: 1.1 H4.1 U1.46 | length 52.6
  Top Layer w0.254: v1(84.328,64.872) 84.455,64.999 85.725,64.999 88.875,61.849 96.254,61.849 v1(97.34,62.934) 102.382,62.934 103.867,61.449 107.842,61.449 111.785,57.506 121.463,57.506 123.266,55.702 123.266,54.178 H4.1
  Bottom Layer w0.254: v1(84.328,64.872) 85.09,64.872 85.141,64.922 1.1 ; v1(97.34,62.934) U1.46
ST_TX: H5.4 U1.16 | length 22.2
  Bottom Layer w0.254: H5.4@74.422,54.864 75.553,53.733 75.553,50.914 76.479,49.987 88.494,49.987 90.759,52.252 U1.16@90.759,53.482
SWCLK: H1.4 U2.34 | length 9.5
  Top Layer w0.254: U2.34 106.604,100.965 107.486,100.082 107.486,96.095 H1.4@108.458,95.123
SWDIO: BT3.1 C3.1 H1.3 U2.33 | length 18.8
  Top Layer w0.254: U2.33 105.181,99.695 105.867,99.009 v1(105.867,97.841)
  Bottom Layer w0.254: BT3.1 C3.1@98.044,101.702 ; C3.1 100.178,99.771 105.08,99.771 105.867,98.984 v1(105.867,97.841) 108.382,97.841 H1.3@108.458,97.917
VCC: 1.4 *1.5 C1.1 C2.1 C4.1 C6.1 C7.1 C15.1 H1.1 IC1.2 R1.2 R2.2 R3.2 R4.2 R5.2 R11.1 R12.2 R13.2 U1.1 U1.13 U1.19 U1.32 U1.48 U1.64 U2.1 U2.13 U2.24 U2.36 U4.1 U5.8 | length 359.5
  Top Layer w0.254: v1(69.926,86.487) 70.587,85.827 70.587,82.659 70.663,82.583 70.663,67.277 70.587,67.201 70.587,58.191 70.688,58.09 v1(71.349,58.09) ; U4.1 70.751,102.73 v1(71.399,103.378) ; v1(74.066,78.283) 74.27,78.08 v1(74.27,73.482) ; v1(74.473,58.064) 77.521,58.064 80.772,54.813 1.4 ; v1(75.286,86.309) 75.311,86.309 79.502,82.118 79.502,68.402 v1(80.747,67.158) ; C2.1@78.054,103.302 C1.1 U2.1@84.506,103.302 ; v1(81.407,73.863) 81.407,85.928 81.839,86.36 U2.13 v1(87.249,87.02) ; U2.1 v1(84.785,103.505) ; v1(97.333,98.425) 102.413,103.505 ; U2.24 v1(101.244,86.335) ; v1(102.641,60.554) 106.705,60.554 107.823,59.436 v1(107.823,57.836) ; v1(103.581,103.683) U2.36 ; C15.1 v1(108.726,86.6) 108.89,86.765 108.89,89.713 R2.2 R4.2 v1(110.744,93.472) 110.744,101.676 H1.1@109.423,102.997 ; C15.1@106.967,84.64 108.331,83.276 C6.1 108.331,75.209 v1(108.382,75.159) ; v1@111.694,75.275 v1(111.735,75.235) *1.5@111.735,76.308 ; v1(113.259,87.859) IC1.2@113.534,87.859 ; C7.1 116.967,75.87 v1(116.992,75.844) ; v1(118.237,92.761) R11.1
  Bottom Layer w0.254: v1(69.926,86.487) 70.104,86.309 v1(75.286,86.309) ; v1(71.349,58.09) 71.526,57.912 71.679,58.064 v1(74.473,58.064) ; v1(71.399,103.378) v1@78.003,103.378 ; R1.2@73.838,73.736 U5.8 81.407,73.82 v1(81.407,73.863) ; R12.2@78.537,57.379 81.991,57.379 82.017,57.353 82.601,57.353 1.4 86.208,54.813 87.826,56.432 U1.19 91.269,56.432 92.34,55.361 92.34,54.304 U1.13 92.34,50.815 93.523,49.632 103.962,49.632 105.435,48.158 107.467,48.158 108.915,49.606 108.915,53.924 C4.1 ; v1(80.747,67.158) 80.899,67.005 86.563,67.005 86.563,65.258 U1.32 ; v1(84.785,103.505) 84.963,103.683 v1(103.581,103.683) 108.229,103.683 H1.1 ; v1(87.249,87.02) 87.935,87.706 100.127,87.706 v1@101.143,86.69 ; R5.2 v1(97.333,98.425) ; U1.48 99.315,63.906 101.778,63.906 102.641,63.043 v1(102.641,60.554) ; U1.1@98.421,53.482 98.421,54.961 98.891,55.432 U1.64 100.985,54.737 103.022,54.737 C4.1 ; v1(101.244,86.335) 103.022,84.557 v1(106.883,84.557) ; v1(108.382,75.159) 108.458,75.235 v1(111.735,75.235) 111.76,75.209 116.357,75.209 v1(116.992,75.844) 117.475,75.362 117.475,64.541 123.317,58.699 123.317,52.095 122.276,51.054 110.541,51.054 109.626,51.968 109.626,56.032 v1(107.823,57.836) 107.671,57.988 106.274,57.988 C4.1 ; v1(108.726,86.6) 111.975,86.6 113.233,87.859 v1(113.259,87.859) ; v1(110.744,93.472) 111.455,92.761 v1(118.237,92.761)
  other v1: 78.054,103.327
VCC_PIN: *1.1 *1.3 *2.5 BT4.1 C9.1 C10.1 C12.1 C13.1 C16.1 IC1.3 IR1.3 R6.2 R8.1 R9.1 R10.1 R15.1 R16.2 R17.1 U3.9 | length 174.7
  Top Layer w0.254: R10.1 72.263,58.522 76.327,54.458 76.327,51.003 77.267,50.063 81.153,50.063 81.813,49.403 88.189,49.403 90.678,46.914 98.73,46.914 IR1.3 100.457,48.641 100.457,48.59 101.879,50.013 101.879,50.394 ; v1(80.34,81.864) R17.1 81.661,91.846 v1(81.991,91.516) ; R8.1@92.126,77.724 92.126,75.413 v1(92.177,75.463) ; 101.829,50.394 C13.1 R16.2 103.937,49.733 104.851,48.819 108.788,48.819 110.185,50.216 112.141,50.216 114.046,52.121 BT4.1 ; U3.9@101.93,73.12 v1(101.93,75.159) ; v1(106.756,86.182) 106.756,87.806 C12.1 ; *1.3@109.794,78.994 109.794,78.09 111.699,78.09 ; *1.1@111.699,79.044 111.699,78.09 ; *1.1@111.938,79.343 111.938,83.007 C10.1 ; v1(112.42,78.08) 112.41,78.09 111.699,78.09 ; v1(113.36,85.598) IC1.3@113.545,85.598 ; C10.1@113.559,83.13 IC1.3 ; IC1.3@114.706,85.598 115.646,86.538 115.646,92.405 R15.1 ; v1(115.062,74.168) C9.1@115.062,76.835
  Bottom Layer w0.254: v1(80.34,81.864) 80.569,81.636 85.547,81.636 91.719,75.463 v1(92.177,75.463) 105.029,75.463 108.56,78.994 v1(109.728,78.994) ; v1(81.991,91.516) 81.991,89.891 R6.2 ; v1(106.756,86.182) 106.798,86.182 106.866,86.25 107.297,85.819 109.049,85.819 109.056,85.827 113.132,85.827 v1(113.36,85.598) ; v1(111.633,65.684) 112.903,65.684 113.03,65.811 ; v1(112.42,78.08) 114.656,78.08 115.138,77.597 v1(115.138,76.86) ; BT4.1 118.999,57.912 v1(118.999,59.69) 118.999,59.842 113.03,65.811 ; v1(115.062,74.168) 115.062,69.596 v1(113.03,67.564) 113.03,65.811
pads on no net: H6. H6.2 H6.3 H6.4 IC1.4 U1.2 U1.3 U1.4 U1.8 U1.9 U1.10 U1.11 U1.14 U1.15 U1.20 U1.21 U1.22 U1.24 U1.25 U1.26 U1.27 U1.28 U1.33 U1.36 U1.37 U1.38 U1.40 U1.41 U1.45 U1.50 U1.51 U1.52 U1.53 U1.54 U1.55 U1.59 U1.60 U1.61 U1.62 U2.8 U2.10 U2.11 U2.12 U2.17 U2.18 U2.20 U2.22 U2.27 U2.28 U2.31 U2.32 U4.6

## Silkscreen, mask and mechanical layers (free items; w line width, h text height)
Top Overlay:
  text "VCC" at 111.023,102.667 h1
  text "GND" at 111.049,100.051 h1
  text "SWDIO" at 110.973,98.044 h1
  text "SWCLK" at 110.973,96.266 h1
  text "SDA" at 72.746,95.479 h1
  text "SCL" at 69.088,95.428 h1
  text "SCL" at 106.02,80.416 h1
  text "SDA" at 106.02,76.632 h1
  text "SWDIO" at 87.198,61.544 h1.52
  text "SWCLK" at 87.173,58.598 h1.52
  text "TX" at 73.685,56.515 h1
  text "RX" at 70.866,56.49 h1
  text "NRST" at 87.198,56.337 h1.52
  text "VCC" at 87.325,54.153 h1.52
  text "GND" at 87.274,51.664 h1.52
  text "TX" at 70.536,49.886 h1
  text "RX" at 73.05,49.835 h1
  text "GND" at 109.677,49.632 h1
  text "BAT+" at 113.538,49.632 h1
  text "SDA" at 74.955,49.454 h1.52
  text "SCL" at 80.467,49.403 h1.52
Bottom Overlay:
  text "DFU BT" at 120.015,104.089 h1
  text "RESET BLE" at 96.139,103.607 h1
  text "ROGO30-v1 / 22062016" at 98.806,91.364 h1
Mechanical 1:
  circle w0.013: c79.215,94.915 r2.5
  circle w0.013: c114.57,94.915 r2.5
  circle w0.013: c79.215,59.559 r2.5
  circle w0.013: c114.57,59.559 r2.5
  circle w0.013: c68.642,77.237 r1.1
  circle w0.013: c122.496,65.298 r1.1
  circle w0.013: c122.496,89.176 r1.1
  lines w0.013: 74.175,59.559 76.675,59.559 79.215,59.559 ; 74.175,94.915 76.675,94.915 79.215,94.915 ; 79.215,54.519 79.215,57.019 79.215,59.559 ; 79.215,64.599 79.215,62.099 79.215,59.559 ; 79.215,89.875 79.215,92.375 79.215,94.915 ; 79.215,99.955 79.215,97.455 79.215,94.915 ; 84.255,59.559 81.755,59.559 79.215,59.559 ; 84.255,94.915 81.755,94.915 79.215,94.915 ; 94.352,77.237 96.892,77.237 ; 96.892,43.447 96.892,72.157 ; 96.892,74.697 96.892,77.237 ; 96.892,79.777 96.892,77.237 ; 96.892,82.317 96.892,111.027 ; 99.432,77.237 96.892,77.237 ; 101.972,77.237 130.682,77.237 ; 109.53,59.559 112.03,59.559 114.57,59.559 ; 109.53,94.915 112.03,94.915 114.57,94.915 ; 114.57,54.519 114.57,57.019 114.57,59.559 ; 114.57,64.599 114.57,62.099 114.57,59.559 ; 114.57,89.875 114.57,92.375 114.57,94.915 ; 114.57,99.955 114.57,97.455 114.57,94.915 ; 118.856,89.176 119.956,89.176 ; 119.61,59.559 117.11,59.559 114.57,59.559 ; 119.61,94.915 117.11,94.915 114.57,94.915 ; 122.496,67.838 122.496,68.938 ; 127.74,72.237 130.892,72.237 130.892,82.237 127.74,82.237 ; 68.892,52.237 ccw(c71.892,52.237) 71.892,49.237 83.016,49.237 ccw(c96.892,77.237) 110.769,49.237 121.892,49.237 ccw(c121.892,52.237) 124.892,52.237 124.892,63.36 ccw(c96.892,77.237) 124.892,91.114 124.892,102.237 ccw(c121.892,102.237) 121.892,105.237 110.769,105.237 ccw(c96.892,77.237) 83.016,105.237 71.892,105.237 ccw(c71.892,102.237) 68.892,102.237 68.892,91.114 ccw(c96.892,77.237) 68.892,63.36 68.892,52.237 ; 93.167,46.962 100.617,46.962 100.617,54.511 93.167,54.511 93.167,46.962

## Text inside footprints (layer, text, board x,y; h text height)
BT4: Top Overlay "1" at 116.586,51.943 h0.8 r180
H1: Top Overlay "1" at 106.324,104.064 h0.8
H2: Top Overlay "1" at 102.743,74.93 h0.8 r90
H3: Top Overlay "1" at 107.442,55.753 h0.8 r270
H4: Top Overlay "3" at 122.301,56.769 h1.27 r90; Top Overlay "4" at 119.761,56.769 h1.27 r90; Top Overlay "2" at 119.761,50.165 h1.27 r90; Top Overlay "1" at 122.301,50.673 h1.27 r90
H5: Top Overlay "3" at 75.59,51.994 h1.27; Top Overlay "4" at 75.59,54.534 h1.27; Top Overlay "2" at 68.986,54.534 h1.27; Top Overlay "1" at 69.494,51.994 h1.27
H7: Top Overlay "1" at 68.047,99.898 h0.8
H8: Top Overlay "1" at 76.276,53.746 h0.8
IR1: Top Overlay "1" at 94.107,45.847 h0.8 r90
L1: Top Overlay "+" at 96.088,75.108 h2.03
L2: Top Overlay "+" at 115.748,62.179 h2.03 r180
L3: Top Overlay "+" at 78.054,56.947 h2.03
L4: Top Overlay "+" at 113.386,92.304 h2.03
L5: Top Overlay "+" at 78.054,92.253 h2.03
U4: Top Overlay "1" at 70.701,101.473 h0.15; Top Overlay "3" at 71.426,100.998 h0.15